# Altium PCB ARDUINO MEGA2560 EXPANSION BOARD.PcbDoc
Units mm, origin at the board's own origin, x right, y up, seen from the top; angles counter-clockwise.
Board outline 132.72 x 90.17 mm, 2 copper layers (Top Layer, Bottom Layer); 30 components, 58 nets, 698 pads, 0 vias.
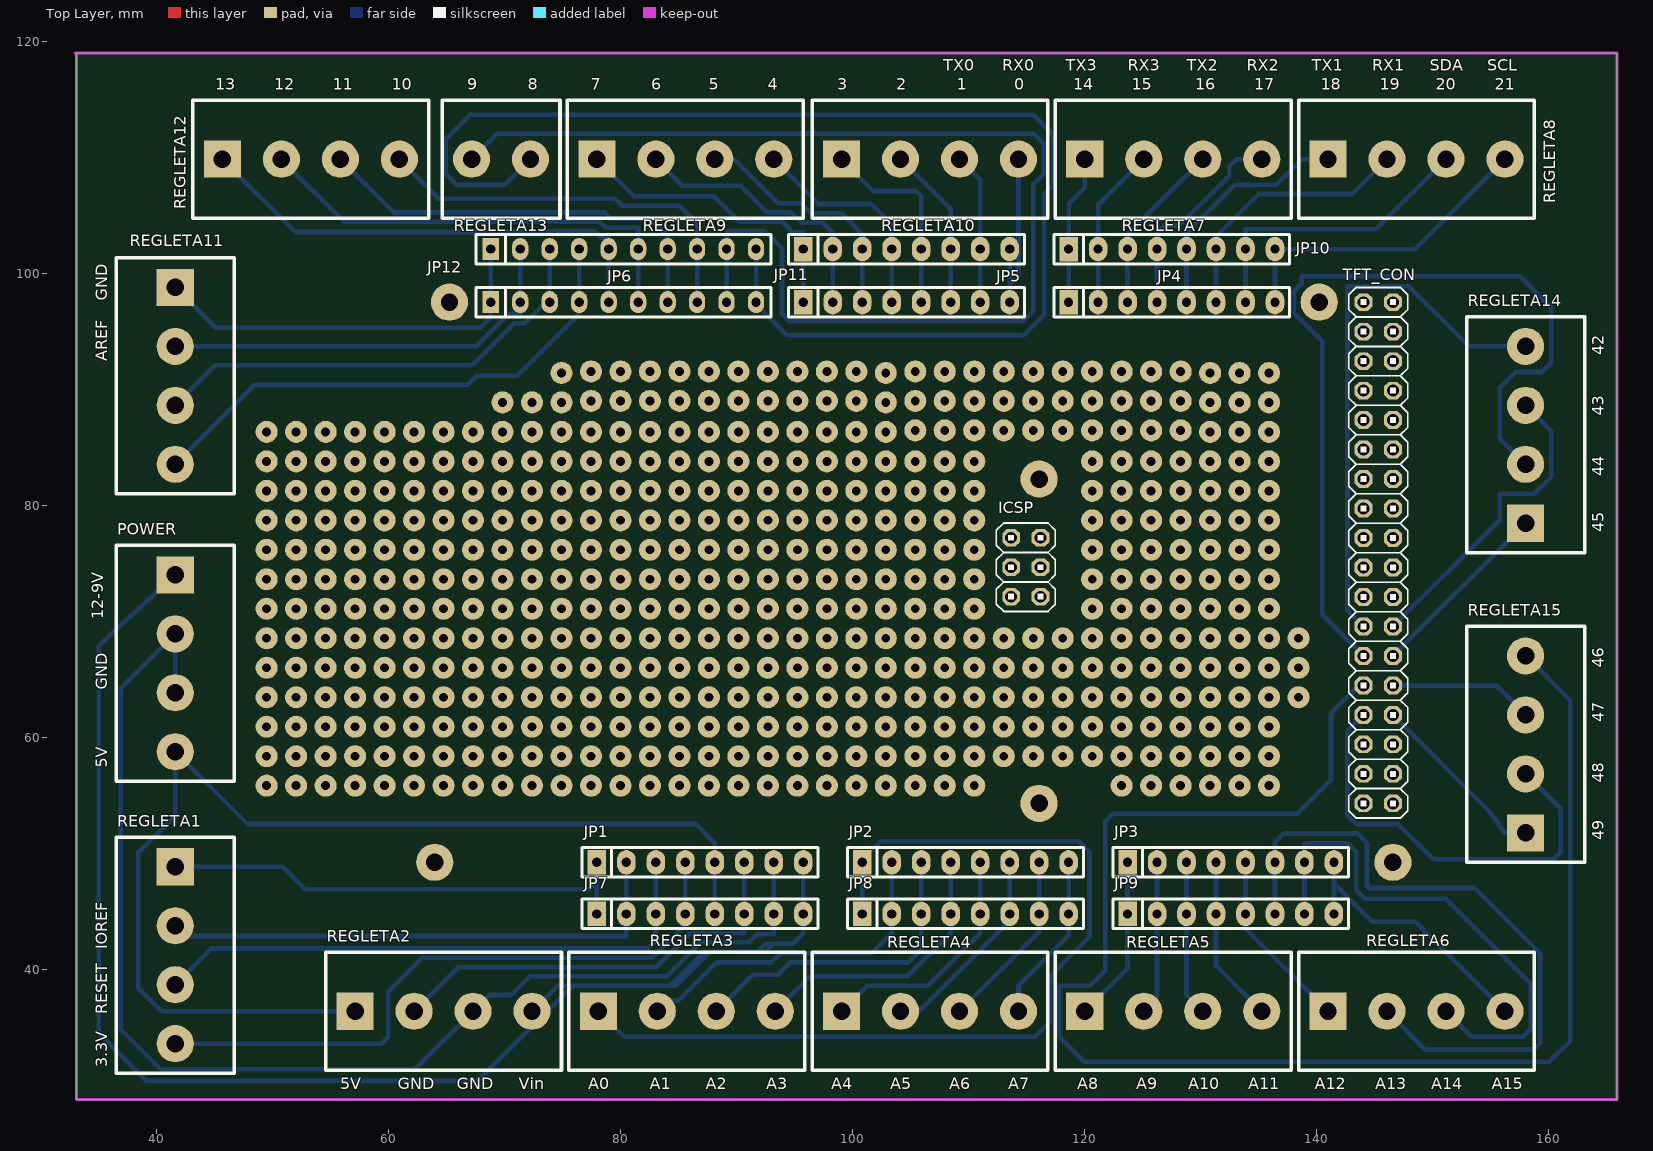
[diagram p0: Top Layer view]
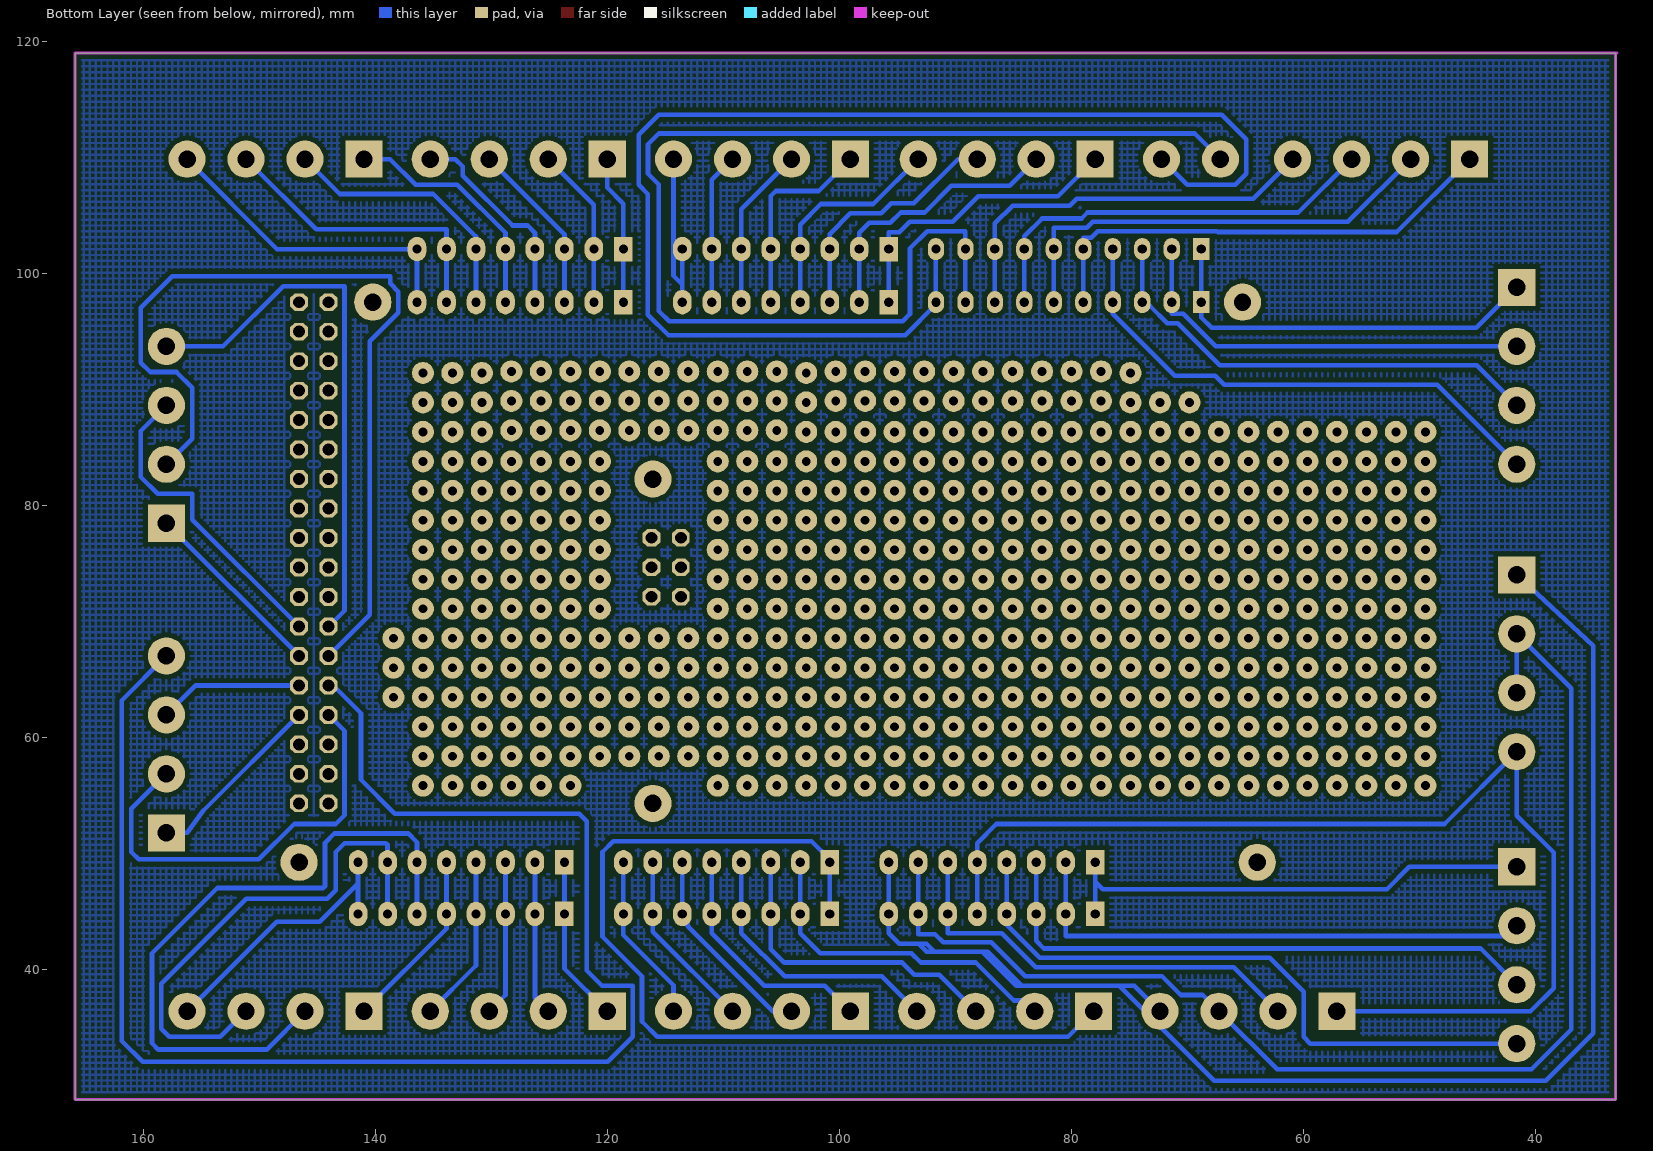
[diagram p1: Bottom Layer view, seen from below]

## Layer stack, top to bottom
Top Solder: solder mask 0.0102, Solder Resist, Dk 3.5
Top Layer: signal copper 0.0356
Dielectric 1: dielectric 0.32, FR-4, Dk 4.8
Bottom Layer: signal copper 0.0356
Bottom Solder: solder mask 0.0102, Solder Resist, Dk 3.5

## Board outline
33.147,118.999 33.147,28.829 162.306,28.829 165.862,28.829 165.862,118.999

## Design rules (kind name [scope] priority, off if disabled: settings)
Clearance [All] p1: gap=0.4
PolygonConnect [All] p1: connectstyle=Relief reliefconductorwidth=0.254 reliefentries=4 polygonreliefangle="90 Angle" airgapwidth=0.254
RoutingLayers [All] p1: top layer_v5=FALSE bottom layer_v5=TRUE
RoutingTopology [All] p1: topology=Daisy_Balanced
RoutingVias [All] p1: holewidth=0.711 width=1.5 viastyle="Through Hole" minholewidth=0.711 minwidth=1.5 maxholewidth=0.711 maxwidth=1.5
SolderMaskExpansion [All] p1: expansion=0.102
Width [All] p1: maxlimit=0.8 minlimit=0.4 preferedwidth=0.4
28 further rules are at their usual default settings.

## Components (designator, comment, footprint, x,y, rotation, side; value= is the part's Value field where it differs from the comment)
ICSP "" SIP_2X03 113.665,77.216 r270 top
JP1 "" SIP_8 77.978,49.276 r0 top
JP2 "" SIP_8 100.838,49.276 r0 top
JP3 "" SIP_8 123.698,49.276 r0 top
JP4 "" SIP_8 118.618,97.536 r0 top
JP5 "" SIP_8 95.758,97.536 r0 top
JP6 "" SIP_10 68.834,97.536 r0 top
JP7 "" SIP_8 77.978,44.831 r0 top
JP8 "" SIP_8 100.838,44.831 r0 top
JP9 "" SIP_8 123.698,44.831 r0 top
JP10 "" SIP_8 118.618,102.108 r0 top
JP11 "" SIP_8 95.758,102.108 r0 top
JP12 "" SIP_10 68.834,102.108 r0 top
POWER "" REGLETA_4 41.656,74.041 r270 top
REGLETA1 "" REGLETA_4 41.656,48.895 r270 top
REGLETA2 "" REGLETA_4 57.15,36.449 r0 top
REGLETA3 "" REGLETA_4 78.105,36.449 r0 top
REGLETA4 "" REGLETA_4 99.06,36.449 r0 top
REGLETA5 "" REGLETA_4 120.015,36.449 r0 top
REGLETA6 "" REGLETA_4 140.97,36.449 r0 top
REGLETA7 "" REGLETA_4 120.015,109.855 r0 top
REGLETA8 "" REGLETA_4 140.97,109.855 r0 top
REGLETA9 "" REGLETA_4 77.978,109.855 r0 top
REGLETA10 "" REGLETA_4 99.06,109.855 r0 top
REGLETA11 "" REGLETA_4 41.656,98.806 r270 top
REGLETA12 "" REGLETA_4 45.72,109.855 r0 top
REGLETA13 "" REGLETA_2 67.183,109.855 r0 top
REGLETA14 "" REGLETA_4 157.988,78.486 r90 top
REGLETA15 "" REGLETA_4 157.988,51.816 r90 top
TFT_CON "" SIP_2X18 144.018,97.536 r270 top

## Footprints (in the part's own frame and the unit in brackets; to place one, negate y for a bottom-side part, rotate by r counter-clockwise, add the part's x,y. Pads: shape width x height; smd on the part's side, far side on the other; paste and mask are expansions set on the pad)
REGLETA_2 [mm]
  round 3.2 hole 1.5: 1(0,0) 2(5.08,0)
  silkscreen extent -2.54,-5.08 7.62,5.08
REGLETA_4 [mm]
  rect 3.2x3.2 hole 1.5: 1(0,0)
  round 3.2 hole 1.5: 2(5.08,0) 3(10.16,0) 4(15.24,0)
  silkscreen extent -2.54,-5.08 17.78,5.08
SIP_2X03 [mil]
  oct 60x60 hole 40: 1(-0.98,0) 2(-0.98,100) 3(99.02,0) 4(99.02,100) 5(199.02,0) 6(199.02,100)
  silkscreen extent -51,-50 249,150
SIP_2X18 [mil]
  oct 60x60 hole 40: 1(0,0) 2(0,100) 3(100,0) 4(100,100) 5(200,0) 6(200,100) 7(300,0) 8(300,100) 9(400,0) 10(400,100) 11(500,0) 12(500,100) 13(600,0) 14(600,100) 15(700,0) 16(700,100) 17(800,0) 18(800,100) 19(900,0) 20(900,100) 21(1000,0) 22(1000,100) 23(1100,0) 24(1100,100) 25(1200,0) 26(1200,100) 27(1300,0) 28(1300,100) 29(1400,0) 30(1400,100) 31(1500,0) 32(1500,100) 33(1600,0) 34(1600,100) 35(1700,0) 36(1700,100)
  silkscreen extent -50,-50 1750,150
SIP_8 [mm]
  rect 1.6x2.1 hole 0.8: 1(0,0)
  oval 1.6x2.1 hole 0.8: 2(2.54,0) 3(5.08,0) 4(7.62,0) 5(10.16,0) 6(12.7,0) 7(15.24,0) 8(17.78,0)
  silkscreen extent -1.27,-1.27 19.05,1.27
SIP_10 [mm]
  rect 1.4x1.9 hole 0.8: 1(0,0)
  oval 1.4x1.9 hole 0.8: 2(2.54,0) 3(5.08,0) 4(7.62,0) 5(10.16,0) 6(12.7,0) 7(15.24,0) 8(17.78,0) 9(20.32,0) 10(22.86,0)
  silkscreen extent -1.27,-1.27 24.13,1.27

## Part data
ICSP: library part SIP_2X3
JP1 JP2 JP3 JP4 JP5 JP7 JP8 JP9 JP10 JP11: library part SIP_8
JP6 JP12: library part SIP_10
POWER REGLETA1 REGLETA2 REGLETA3 REGLETA4 REGLETA5 REGLETA6 REGLETA7 REGLETA8 REGLETA9 REGLETA10 REGLETA11 REGLETA12 REGLETA14 REGLETA15: library part REGLETA_4
REGLETA13: library part REGLETA_2
TFT_CON: library part SIP_2X18

## Free pads (board coordinates)
  round 1.9 hole 0.762: 1(49.53,58.42) 1(49.53,86.36) 1(52.07,58.42) 1(52.07,63.5) 1(52.07,68.58) 1(52.07,73.66) 1(52.07,78.74) 1(52.07,83.82) 1(52.07,86.36) 1(77.47,58.42) 1(77.47,86.36) 1(77.47,89.027) 1(77.47,91.567) 1(80.01,58.42) 1(80.01,63.5) 1(80.01,68.58) 1(80.01,73.66) 1(80.01,78.74) 1(80.01,83.82) 1(80.01,86.36) 1(105.41,55.88) 1(105.41,58.42) 1(105.41,63.5) 1(105.41,68.58) 1(105.41,89.027) 1(105.41,91.567) 1(123.19,55.88) 1(130.81,55.88) 1(133.35,91.44) 1(135.89,91.44) 2(49.53,83.82) 2(54.61,58.42) 2(54.61,63.5) 2(54.61,68.58) 2(54.61,73.66) 2(54.61,78.74) 2(54.61,83.82) 2(54.61,86.36) 2(77.47,83.82) 2(80.01,89.027) 2(80.01,91.567) 2(82.55,58.42) 2(82.55,63.5) 2(82.55,68.58) 2(82.55,73.66) 2(82.55,78.74) 2(82.55,83.82) 2(82.55,86.36) 2(107.95,55.88) 2(107.95,58.42) 2(107.95,63.5) 2(107.95,68.58) 2(107.95,89.027) 2(107.95,91.567) 2(125.73,55.88) 2(133.35,55.88) 2(133.35,88.9) 2(135.89,88.9) 3(49.53,81.28) 3(57.15,58.42) 3(57.15,63.5) 3(57.15,68.58) 3(57.15,73.66) 3(57.15,78.74) 3(57.15,83.82) 3(57.15,86.36) 3(77.47,81.28) 3(82.55,89.027) 3(82.55,91.567) 3(85.09,58.42) 3(85.09,63.5) 3(85.09,68.58) 3(85.09,73.66) 3(85.09,78.74) 3(85.09,83.82) 3(85.09,86.36) 3(110.49,55.88) 3(110.49,58.42) 3(110.49,63.5) 3(110.49,68.58) 3(110.49,89.027) 3(110.49,91.567) 3(128.27,55.88) 3(133.35,86.36) 3(135.89,55.88) 3(135.89,86.36) 4(49.53,78.74) 4(59.69,58.42) 4(59.69,63.5) 4(59.69,68.58) 4(59.69,73.66) 4(59.69,78.74) 4(59.69,83.82) 4(59.69,86.36) 4(77.47,78.74) 4(85.09,89.027) 4(85.09,91.567) 4(87.63,58.42) 4(87.63,63.5) 4(87.63,68.58) 4(87.63,73.66) 4(87.63,78.74) 4(87.63,83.82) 4(87.63,86.36) 4(107.95,83.82) 4(110.49,83.82) 4(113.03,58.42) 4(113.03,63.5) 4(113.03,68.58) 4(113.03,89.027) 4(113.03,91.567) 4(125.73,83.82) 4(128.27,83.82) 4(133.35,83.82) 4(135.89,83.82) 5(49.53,76.2) 5(62.23,58.42) 5(62.23,63.5) 5(62.23,68.58) 5(62.23,73.66) 5(62.23,78.74) 5(62.23,83.82) 5(62.23,86.36) 5(77.47,76.2) 5(87.63,89.027) 5(87.63,91.567) 5(90.17,58.42) 5(90.17,63.5) 5(90.17,68.58) 5(90.17,73.66) 5(90.17,78.74) 5(90.17,83.82) 5(90.17,86.36) 5(107.95,81.28) 5(110.49,81.28) 5(115.57,58.42) 5(115.57,63.5) 5(115.57,68.58) 5(115.57,89.027) 5(115.57,91.567) 5(125.73,81.28) 5(128.27,81.28) 5(133.35,81.28) 5(135.89,81.28) 6(49.53,73.66) 6(64.77,58.42) 6(64.77,63.5) 6(64.77,68.58) 6(64.77,73.66) 6(64.77,78.74) 6(64.77,83.82) 6(64.77,86.36) 6(77.47,73.66) 6(90.17,89.027) 6(90.17,91.567) 6(92.71,58.42) 6(92.71,63.5) 6(92.71,68.58) 6(92.71,73.66) 6(92.71,78.74) 6(92.71,83.82) 6(92.71,86.36) 6(107.95,78.74) 6(110.49,78.74) 6(118.11,58.42) 6(118.11,63.5) 6(118.11,68.58) 6(118.11,89.027) 6(118.11,91.567) 6(125.73,78.74) 6(128.27,78.74) 6(133.35,78.74) 6(135.89,78.74) 7(49.53,71.12) 7(67.31,58.42) 7(67.31,63.5) 7(67.31,68.58) 7(67.31,73.66) 7(67.31,78.74) 7(67.31,83.82) 7(67.31,86.36) 7(77.47,71.12) 7(92.71,89.027) 7(92.71,91.567) 7(95.25,58.42) 7(95.25,63.5) 7(95.25,68.58) 7(95.25,73.66) 7(95.25,78.74) 7(95.25,83.82) 7(95.25,86.36) 7(107.95,76.2) 7(110.49,76.2) 7(120.65,58.42) 7(120.65,63.5) 7(120.65,68.58) 7(120.65,89.027) 7(120.65,91.567) 7(125.73,76.2) 7(128.27,76.2) 7(133.35,76.2) 7(135.89,76.2) 8(49.53,68.58) 8(69.85,58.42) 8(69.85,63.5) 8(69.85,68.58) 8(69.85,73.66) 8(69.85,78.74) 8(69.85,83.82) 8(69.85,86.36) 8(77.47,68.58) 8(95.25,89.027) 8(95.25,91.567) 8(97.79,58.42) 8(97.79,63.5) 8(97.79,68.58) 8(97.79,73.66) 8(97.79,78.74) 8(97.79,83.82) 8(97.79,86.36) 8(107.95,73.66) 8(110.49,73.66) 8(123.19,58.42) 8(123.19,63.5) 8(123.19,68.58) 8(123.19,89.027) 8(123.19,91.567) 8(125.73,73.66) 8(128.27,73.66) 8(130.81,58.42) 8(130.81,63.5) 8(133.35,73.66) 8(135.89,73.66) 9(49.53,66.04) 9(72.39,58.42) 9(72.39,63.5) 9(72.39,68.58) 9(72.39,73.66) 9(72.39,78.74) 9(72.39,83.82) 9(72.39,86.36) 9(72.39,88.9) 9(77.47,66.04) 9(97.79,89.027) 9(97.79,91.567) 9(100.33,58.42) 9(100.33,63.5) 9(100.33,68.58) 9(100.33,73.66) 9(100.33,78.74) 9(100.33,83.82) 9(100.33,86.36) 9(107.95,71.12) 9(110.49,71.12) 9(125.73,58.42) 9(125.73,63.5) 9(125.73,68.58) 9(125.73,71.12) 9(125.73,89.027) 9(125.73,91.567) 9(128.27,71.12) 9(133.35,58.42) 9(133.35,63.5) 9(133.35,71.12) 9(135.89,71.12) 10(49.53,63.5) 10(69.85,88.9) 10(74.93,58.42) 10(74.93,63.5) 10(74.93,68.58) 10(74.93,73.66) 10(74.93,78.74) 10(74.93,83.82) 10(74.93,86.36) 10(74.93,88.9) 10(74.93,91.44) 10(77.47,63.5) 10(100.33,89.027) 10(100.33,91.567) 10(102.87,58.42) 10(102.87,63.5) 10(102.87,68.58) 10(102.87,73.66) 10(102.87,78.74) 10(102.87,83.82) 10(102.87,86.36) 10(128.27,58.42) 10(128.27,63.5) 10(128.27,68.58) 10(128.27,89.027) 10(128.27,91.567) 10(133.35,68.58) 10(135.89,58.42) 10(135.89,63.5) 10(135.89,68.58) 10(138.43,63.5) 10(138.43,66.04) 10(138.43,68.58) 11(74.93,55.88) 11(74.93,60.96) 11(74.93,66.04) 11(74.93,71.12) 11(74.93,76.2) 11(74.93,81.28) 11(102.87,55.88) 11(102.87,60.96) 11(102.87,66.04) 11(102.87,71.12) 11(102.87,76.2) 11(102.87,81.28) 11(128.27,60.96) 11(128.27,66.04) 11(128.27,86.487) 11(130.81,68.58) 11(135.89,60.96) 11(135.89,66.04) 12(72.39,55.88) 12(72.39,60.96) 12(72.39,66.04) 12(72.39,71.12) 12(72.39,76.2) 12(72.39,81.28) 12(100.33,55.88) 12(100.33,60.96) 12(100.33,66.04) 12(100.33,71.12) 12(100.33,76.2) 12(100.33,81.28) 12(105.41,71.12) 12(120.65,71.12) 12(123.19,71.12) 12(125.73,60.96) 12(125.73,66.04) 12(125.73,86.487) 12(130.81,71.12) 12(133.35,60.96) 12(133.35,66.04) 13(69.85,55.88) 13(69.85,60.96) 13(69.85,66.04) 13(69.85,71.12) 13(69.85,76.2) 13(69.85,81.28) 13(97.79,55.88) 13(97.79,60.96) 13(97.79,66.04) 13(97.79,71.12) 13(97.79,76.2) 13(97.79,81.28) 13(105.41,73.66) 13(120.65,73.66) 13(123.19,60.96) 13(123.19,66.04) 13(123.19,73.66) 13(123.19,86.487) 13(130.81,60.96) 13(130.81,66.04) 13(130.81,73.66) 14(67.31,55.88) 14(67.31,60.96) 14(67.31,66.04) 14(67.31,71.12) 14(67.31,76.2) 14(67.31,81.28) 14(95.25,55.88) 14(95.25,60.96) 14(95.25,66.04) 14(95.25,71.12) 14(95.25,76.2) 14(95.25,81.28) 14(105.41,76.2) 14(120.65,60.96) 14(120.65,66.04) 14(120.65,76.2) 14(120.65,86.487) 14(123.19,76.2) 14(130.81,76.2) 15(64.77,55.88) 15(64.77,60.96) 15(64.77,66.04) 15(64.77,71.12) 15(64.77,76.2) 15(64.77,81.28) 15(92.71,55.88) 15(92.71,60.96) 15(92.71,66.04) 15(92.71,71.12) 15(92.71,76.2) 15(92.71,81.28) 15(105.41,78.74) 15(118.11,60.96) 15(118.11,66.04) 15(118.11,86.487) 15(120.65,78.74) 15(123.19,78.74) 15(130.81,78.74) 16(62.23,55.88) 16(62.23,60.96) 16(62.23,66.04) 16(62.23,71.12) 16(62.23,76.2) 16(62.23,81.28) 16(90.17,55.88) 16(90.17,60.96) 16(90.17,66.04) 16(90.17,71.12) 16(90.17,76.2) 16(90.17,81.28) 16(105.41,81.28) 16(115.57,60.96) 16(115.57,66.04) 16(115.57,86.487) 16(120.65,81.28) 16(123.19,81.28) 16(130.81,81.28) 17(59.69,55.88) 17(59.69,60.96) 17(59.69,66.04) 17(59.69,71.12) 17(59.69,76.2) 17(59.69,81.28) 17(87.63,55.88) 17(87.63,60.96) 17(87.63,66.04) 17(87.63,71.12) 17(87.63,76.2) 17(87.63,81.28) 17(105.41,83.82) 17(113.03,60.96) 17(113.03,66.04) 17(113.03,86.487) 17(120.65,83.82) 17(123.19,83.82) 17(130.81,83.82) 18(57.15,55.88) 18(57.15,60.96) 18(57.15,66.04) 18(57.15,71.12) 18(57.15,76.2) 18(57.15,81.28) 18(85.09,55.88) 18(85.09,60.96) 18(85.09,66.04) 18(85.09,71.12) 18(85.09,76.2) 18(85.09,81.28) 18(110.49,60.96) 18(110.49,66.04) 18(110.49,86.487) 18(130.81,86.36) 19(54.61,55.88) 19(54.61,60.96) 19(54.61,66.04) 19(54.61,71.12) 19(54.61,76.2) 19(54.61,81.28) 19(82.55,55.88) 19(82.55,60.96) 19(82.55,66.04) 19(82.55,71.12) 19(82.55,76.2) 19(82.55,81.28) 19(102.87,88.9) 19(107.95,60.96) 19(107.95,66.04) 19(107.95,86.487) 19(130.81,88.9) 20(49.53,55.88) 20(49.53,60.96) 20(52.07,55.88) 20(52.07,60.96) 20(52.07,66.04) 20(52.07,71.12) 20(52.07,76.2) 20(52.07,81.28) 20(77.47,55.88) 20(77.47,60.96) 20(80.01,55.88) 20(80.01,60.96) 20(80.01,66.04) 20(80.01,71.12) 20(80.01,76.2) 20(80.01,81.28) 20(102.87,91.44) 20(105.41,60.96) 20(105.41,66.04) 20(105.41,86.487) 20(130.81,91.44)
  round 3.2 hole 1.5: 1(64.008,49.276) 1(65.278,97.536) 1(116.078,54.356) 1(116.078,82.296) 1(140.208,97.536) 1(146.558,49.276)

## Nets (pads, with @x,y where several pads share a name; then routed paths per layer and width w, separated by ;. In a path a pad name is that pad's centre, name@x,y a point inside that pad or via, vN(x,y) a via of type N, cw(c..) or ccw(c..) an arc to the next point about the centre after c; other vN are vias at no path point)
NetJP1_1: JP1.1 JP7.1 REGLETA1.1 | length 41.8
  Bottom Layer w0.4: REGLETA1.1 50.902,48.895 52.832,46.965 77.318,46.965 77.978,47.625 ; JP7.1 77.978,47.625 ; JP1.1 77.978,47.625
NetJP1_2: JP1.2 JP7.2 REGLETA1.2 | length 45.6
  Bottom Layer w0.4: REGLETA1.2 42.545,42.926 80.518,42.926 JP7.2 JP1.2
NetJP1_3: JP1.3 JP7.3 REGLETA1.3 | length 49.7
  Bottom Layer w0.4: REGLETA1.3 44.77,41.849 82.387,41.849 83.058,42.52 JP7.3 JP1.3
NetJP1_4: JP1.4 JP7.4 REGLETA1.4 | length 55.8
  Bottom Layer w0.4: REGLETA1.4 59.436,33.655 60.02,34.239 60.02,38.125 62.944,41.049 82.731,41.049 85.598,43.916 JP7.4 JP1.4
NetJP1_5: JP1.5 JP7.5 POWER.4 REGLETA2.1 | length 97
  Bottom Layer w0.4: REGLETA2.1 40.472,36.449 38.481,38.44 38.481,50.12 41.656,53.295 POWER.4 47.879,52.578 86.487,52.578 88.138,50.927 JP1.5 JP7.5
NetJP1_6: JP1.6 JP7.6 REGLETA2.2 | length 37.3
  Bottom Layer w0.4: REGLETA2.2 66.03,40.249 83.099,40.249 86.031,43.181 90.678,43.181 JP7.6 JP1.6
NetJP1_7: JP1.7 JP7.7 POWER.2 POWER.3 REGLETA2.3 | length 109.8
  Bottom Layer w0.4: POWER.3 POWER.2 36.957,64.262 36.957,34.874 40.386,31.445 62.306,31.445 REGLETA2.3 68.707,37.846 70.612,37.846 72.215,39.449 83.98,39.449 86.912,42.381 91.073,42.381 91.771,43.078 93.218,43.078 JP7.7 JP1.7
NetJP1_8: JP1.8 JP7.8 POWER.1 REGLETA2.4 | length 126.8
  Bottom Layer w0.4: POWER.1 35.052,67.945 35.052,34.544 39.141,30.455 67.701,30.455 75.895,38.649 ; REGLETA2.4 74.59,38.649 75.895,38.649 ; JP1.8 JP7.8 95.758,43.18 94.844,42.266 93.186,42.266 ; 75.895,38.649 84.312,38.649 ; 84.312,38.649 84.785,38.649 87.717,41.581 ; 84.312,38.649 87.244,41.581 87.717,41.581 ; 87.717,41.581 91.822,41.581 ; 91.822,41.581 92.501,41.581 93.186,42.266 ; 91.822,41.581 92.507,42.266 93.186,42.266
NetJP2_1: JP2.1 JP8.1 REGLETA3.1 | length 81.7
  Bottom Layer w0.4: REGLETA3.1 80.315,34.239 115.694,34.239 117.015,35.56 117.015,39.449 120.421,42.855 120.421,50.165 119.482,51.105 102.413,51.105 100.838,49.53 JP2.1 JP8.1
NetJP2_2: JP2.2 JP8.2 REGLETA3.2 | length 29.1
  Bottom Layer w0.4: REGLETA3.2 84.106,37.37 84.999,37.37 88.272,40.643 92.992,40.643 93.801,41.453 101.651,41.453 103.378,43.18 JP8.2 JP2.2
NetJP2_3: JP2.3 JP8.3 REGLETA3.3 | length 27.4
  Bottom Layer w0.4: REGLETA3.3 91.403,39.587 93.548,39.587 94.601,40.64 104.775,40.64 105.918,41.783 JP8.3 JP2.3
NetJP2_4: JP2.4 JP8.4 REGLETA3.4 | length 24
  Bottom Layer w0.4: REGLETA3.4 96.345,39.449 104.727,39.449 108.458,43.18 JP8.4 JP2.4
NetJP2_5: JP2.5 JP8.5 REGLETA4.1 | length 20.8
  Bottom Layer w0.4: REGLETA4.1 101.26,38.649 106.467,38.649 110.998,43.18 JP8.5 JP2.5
NetJP2_6: JP2.6 JP8.6 REGLETA4.2 | length 17.6
  Bottom Layer w0.4: REGLETA4.2 105.75,36.449 113.03,43.729 JP8.6 JP2.6
NetJP2_7: JP2.7 JP8.7 REGLETA4.3 | length 15.7
  Bottom Layer w0.4: REGLETA4.3 116.078,43.307 JP8.7 JP2.7
NetJP2_8: JP2.8 JP8.8 REGLETA4.4 | length 14.6
  Bottom Layer w0.4: REGLETA4.4 114.3,38.7 118.618,43.018 JP8.8 JP2.8
NetJP3_1: JP3.1 JP9.1 REGLETA5.1 | length 14.4
  Bottom Layer w0.4: REGLETA5.1 123.698,40.132 JP9.1 JP3.1
NetJP3_2: JP3.2 JP9.2 REGLETA5.2 | length 13.3
  Bottom Layer w0.4: REGLETA5.2 126.238,37.592 JP9.2 JP3.2
NetJP3_3: JP3.3 JP9.3 REGLETA5.3 | length 13.4
  Bottom Layer w0.4: JP3.3 JP9.3 128.778,37.846 REGLETA5.3
NetJP3_4: JP3.4 JP9.4 REGLETA5.4 | length 14.5
  Bottom Layer w0.4: JP3.4 JP9.4 131.318,40.386 REGLETA5.4
NetJP3_5: JP3.5 JP9.5 REGLETA6.1 | length 15.8
  Bottom Layer w0.4: JP3.5 JP9.5 133.858,43.561 REGLETA6.1
NetJP3_6: JP3.6 JP9.6 REGLETA6.2 | length 58.3
  Bottom Layer w0.4: JP9.6 JP3.6 136.398,51.003 137.16,51.765 143.51,51.765 144.323,50.952 144.323,47.219 144.475,47.066 153.619,47.066 159.233,41.453 159.233,33.68 158.7,33.147 149.352,33.147 REGLETA6.2
NetJP3_7: JP3.7 JP9.7 REGLETA6.3 | length 44.8
  Bottom Layer w0.4: JP9.7 JP3.7 138.938,50.775 139.09,50.927 142.646,50.927 143.408,50.165 143.408,46.863 144.145,46.126 151.105,46.126 158.42,38.811 158.42,34.925 157.734,34.239 153.34,34.239 REGLETA6.3
NetJP3_8: JP3.8 JP9.8 REGLETA6.4 | length 23.7
  Bottom Layer w0.4: JP9.8 141.478,47.473 ; JP3.8 141.478,47.473 ; REGLETA6.4 148.488,44.171 144.78,44.171 141.478,47.473
NetJP4_1: JP4.1 JP10.1 REGLETA7.1 | length 12.9
  Bottom Layer w0.4: JP4.1 JP10.1 118.618,106.02 120.015,107.417 REGLETA7.1
NetJP4_2: JP4.2 JP10.2 REGLETA7.2 | length 13.9
  Bottom Layer w0.4: JP4.2 JP10.2 121.158,105.918 REGLETA7.2
NetJP4_3: JP4.3 JP10.3 REGLETA7.3 | length 15
  Bottom Layer w0.4: JP4.3 JP10.3 123.698,103.378 REGLETA7.3
NetJP4_4: JP4.4 JP10.4 REGLETA7.4 | length 18.1
  Bottom Layer w0.4: JP4.4 JP10.4 126.238,103.505 126.873,104.14 128.168,104.14 132.461,108.433 132.461,109.22 133.096,109.855 REGLETA7.4
NetJP4_5: JP4.5 JP10.5 REGLETA8.1 | length 20.8
  Bottom Layer w0.4: JP4.5 JP10.5 128.778,103.505 132.928,107.655 136.525,107.655 138.725,109.855 REGLETA8.1
NetJP4_6: JP4.6 JP10.6 REGLETA8.2 | length 23.1
  Bottom Layer w0.4: JP4.6 JP10.6 131.318,103.187 134.986,106.855 143.05,106.855 REGLETA8.2
NetJP4_7: JP4.7 JP10.7 REGLETA8.3 | length 26
  Bottom Layer w0.4: JP4.7 JP10.7 133.858,103.81 145.085,103.81 REGLETA8.3
NetJP4_8: JP4.8 JP10.8 REGLETA8.4 | length 27.6
  Bottom Layer w0.4: JP4.8 JP10.8 148.463,102.108 REGLETA8.4
NetJP5_1: JP5.1 JP11.1 REGLETA9.1 | length 26.4
  Bottom Layer w0.4: REGLETA9.1 81.178,106.655 88.062,106.655 90.258,104.458 93.935,104.458 94.837,103.556 95.758,103.556 JP11.1 JP5.1
NetJP5_2: JP5.2 JP11.2 REGLETA9.2 | length 23.8
  Bottom Layer w0.4: REGLETA9.2 85.344,107.569 90.357,107.569 92.668,105.258 94.735,105.258 95.624,104.369 97.434,104.369 98.298,103.505 JP11.2 JP5.2
NetJP5_3: JP5.3 JP11.3 REGLETA9.3 | length 21.2
  Bottom Layer w0.4: REGLETA9.3 89.789,109.855 93.586,106.058 95.535,106.058 96.411,105.181 99.06,105.181 100.838,103.403 JP11.3 JP5.3
NetJP5_4: JP5.4 JP11.4 REGLETA9.4 | length 19.2
  Bottom Layer w0.4: REGLETA9.4 97.079,105.994 101.6,105.994 103.378,104.216 JP11.4 JP5.4
NetJP5_5: JP5.5 JP11.5 REGLETA10.1 | length 17.3
  Bottom Layer w0.4: REGLETA10.1 101.803,107.112 105.486,107.112 105.918,106.68 JP11.5 JP5.5
NetJP5_6: JP5.6 JP11.6 REGLETA10.2 | length 14.1
  Bottom Layer w0.4: REGLETA10.2 108.458,105.537 JP11.6 JP5.6
NetJP5_7: JP5.7 JP11.7 REGLETA10.3 | length 13.1
  Bottom Layer w0.4: REGLETA10.3 110.998,108.077 JP11.7 JP5.7
NetJP5_8: JP5.8 JP11.8 REGLETA10.4 | length 15.7
  Bottom Layer w0.4: JP5.8 113.538,99.06 ; JP11.8 113.538,99.06 ; REGLETA10.4 114.3,99.822 113.538,99.06
NetJP6_1: JP6.1 JP12.1 REGLETA11.1 | length 34.9
  Bottom Layer w0.4: REGLETA11.1 45.136,95.326 67.945,95.326 68.834,96.215 JP6.1 JP12.1
NetJP6_2: JP6.2 JP12.2 REGLETA11.2 | length 36.5
  Bottom Layer w0.4: REGLETA11.2 67.571,93.726 70.377,96.533 71.374,96.533 JP6.2 JP12.2
NetJP6_3: JP6.3 JP12.3 REGLETA11.3 | length 40.7
  Bottom Layer w0.4: REGLETA11.3 45.11,92.1 67.234,92.1 70.866,95.733 71.78,95.733 73.254,97.206 73.914,97.206 JP6.3 JP12.3
NetJP6_4: JP6.4 JP12.4 REGLETA11.4 | length 45.8
  Bottom Layer w0.4: REGLETA11.4 48.514,90.424 66.853,90.424 67.615,91.186 71.12,91.186 76.454,96.52 JP6.4 JP12.4
NetJP6_5: JP6.5 JP12.5 REGLETA12.1 | length 41.7
  Bottom Layer w0.4: REGLETA12.1 51.993,103.582 67.412,103.582 67.488,103.658 77.749,103.658 78.309,103.099 78.994,103.099 JP12.5 JP6.5
NetJP6_6: JP6.6 JP12.6 REGLETA12.2 | length 39.6
  Bottom Layer w0.4: REGLETA12.2 56.197,104.458 78.182,104.458 78.703,103.937 81.534,103.937 JP12.6 JP6.6
NetJP6_7: JP6.7 JP12.7 REGLETA12.3 | length 36.6
  Bottom Layer w0.4: REGLETA12.3 60.477,105.258 78.638,105.258 79.15,104.745 82.55,104.745 84.074,103.221 JP12.7 JP6.7
NetJP6_8: JP6.8 JP12.8 REGLETA12.4 | length 34.7
  Bottom Layer w0.4: REGLETA12.4 64.364,106.451 79.553,106.451 80.162,105.842 85.09,105.842 86.614,104.318 JP12.8 JP6.8
NetJP6_9: JP6.9 JP12.9 REGLETA13.1 | length 104.8
  Bottom Layer w0.4: REGLETA13.1 69.393,112.065 115.56,112.065 116.5,111.125 116.5,108.601 115.57,107.671 115.57,96.774 114.681,95.885 94.564,95.885 93.929,96.52 93.929,102.184 92.455,103.658 89.154,103.658 JP12.9 JP6.9
NetJP6_10: JP6.10 JP12.10 REGLETA13.2 | length 112.7
  Bottom Layer w0.4: REGLETA13.2 70.053,107.645 65.913,107.645 64.973,108.585 64.973,111.582 67.081,113.69 115.57,113.69 117.3,111.96 117.3,107.645 116.51,106.855 116.51,96.469 114.732,94.691 94.336,94.691 91.694,97.333 JP6.10 JP12.10
NetREGLETA14_1: REGLETA14.1 TFT_CON.26 | length 16.2
  Bottom Layer w0.4: TFT_CON.26 REGLETA14.1
NetREGLETA14_2: REGLETA14.2 TFT_CON.25 | length 75.7
  Bottom Layer w0.4: TFT_CON.25 140.462,70.612 140.462,94.17 138.008,96.625 138.008,98.447 138.709,99.149 138.709,99.771 157.48,99.771 160.198,97.053 160.198,92.329 159.385,91.516 157.124,91.516 155.778,90.17 155.778,85.776 REGLETA14.2
NetREGLETA14_3: REGLETA14.3 TFT_CON.24 | length 27.4
  Bottom Layer w0.4: TFT_CON.24 155.753,78.791 155.753,81.026 158.75,81.026 160.198,82.474 160.198,86.436 REGLETA14.3
NetREGLETA14_4: REGLETA14.4 TFT_CON.23 | length 47.4
  Bottom Layer w0.4: TFT_CON.23 142.646,70.968 142.646,98.908 147.93,98.908 153.111,93.726 REGLETA14.4
NetREGLETA15_1: REGLETA15.1 TFT_CON.30 | length 15.8
  Bottom Layer w0.4: TFT_CON.30 154.838,53.696 156.21,51.816 REGLETA15.1
NetREGLETA15_2: REGLETA15.2 TFT_CON.29 | length 37.4
  Bottom Layer w0.4: TFT_CON.29 142.646,60.604 142.646,53.34 143.408,52.578 146.99,52.578 150.038,49.53 160.376,49.53 161.011,50.165 161.011,53.873 REGLETA15.2
NetREGLETA15_3: REGLETA15.3 TFT_CON.28 | length 12.5
  Bottom Layer w0.4: TFT_CON.28 155.448,64.516 REGLETA15.3
NetREGLETA15_4: REGLETA15.4 TFT_CON.27 | length 132.6
  Bottom Layer w0.4: TFT_CON.27 143.637,64.516 141.224,62.103 141.224,56.388 138.303,53.467 122.428,53.467 121.768,52.807 121.768,39.954 120.462,38.649 117.815,38.649 117.815,34.239 119.974,32.08 160.02,32.08 161.823,33.884 161.823,63.221 REGLETA15.4
pads on no net: ICSP.1 ICSP.2 ICSP.3 ICSP.4 ICSP.5 ICSP.6 TFT_CON.1 TFT_CON.2 TFT_CON.3 TFT_CON.4 TFT_CON.5 TFT_CON.6 TFT_CON.7 TFT_CON.8 TFT_CON.9 TFT_CON.10 TFT_CON.11 TFT_CON.12 TFT_CON.13 TFT_CON.14 TFT_CON.15 TFT_CON.16 TFT_CON.17 TFT_CON.18 TFT_CON.19 TFT_CON.20 TFT_CON.21 TFT_CON.22 TFT_CON.31 TFT_CON.32 TFT_CON.33 TFT_CON.34 TFT_CON.35 TFT_CON.36

## Polygon pours and split planes (outlines as drawn)
no net on Bottom Layer "Top Layer-No Net" (hatched 90Degree grid 0.508 track 0.203, pour order 2): 33.401,118.872 165.735,118.872 165.735,28.829 33.02,28.829 33.02,118.872 33.147,118.999

## Keep-outs
Keep-Out Layer:
  lines w0.254: 33.02,118.999 165.862,118.999 165.862,28.829 33.147,28.829 33.147,118.999

## Silkscreen, mask and mechanical layers (free items; w line width, h text height)
Top Overlay:
  text "TX0" at 107.823,117.475 h1.02
  text "RX0" at 112.903,117.475 h1.02
  text "TX3" at 118.364,117.475 h1.02
  text "RX3" at 123.698,117.475 h1.02
  text "TX2" at 128.778,117.475 h1.02
  text "RX2" at 133.985,117.475 h1.02
  text "TX1" at 139.573,117.475 h1.02
  text "RX1" at 144.78,117.475 h1.02
  text "SDA" at 149.733,117.475 h1.02
  text "SCL" at 154.686,117.475 h1.02
  text "13" at 45.085,115.824 h1.02
  text "12" at 50.165,115.824 h1.02
  text "11" at 55.245,115.824 h1.02
  text "10" at 60.325,115.824 h1.02
  text "9" at 66.802,115.824 h1.02
  text "8" at 72.009,115.824 h1.02
  text "7" at 77.47,115.824 h1.02
  text "6" at 82.677,115.824 h1.02
  text "5" at 87.63,115.824 h1.02
  text "4" at 92.71,115.824 h1.02
  text "3" at 98.679,115.824 h1.02
  text "2" at 103.759,115.824 h1.02
  text "1" at 108.966,115.824 h1.02
  text "0" at 113.919,115.824 h1.02
  text "14" at 118.999,115.824 h1.02
  text "15" at 124.079,115.824 h1.02
  text "16" at 129.54,115.824 h1.02
  text "17" at 134.62,115.824 h1.02
  text "18" at 140.335,115.824 h1.02
  text "19" at 145.415,115.824 h1.02
  text "20" at 150.241,115.824 h1.02
  text "21" at 155.321,115.824 h1.02
  text "GND" at 35.814,97.663 h1.02 r90
  text "42" at 164.719,92.964 h1.02 r90
  text "AREF" at 35.814,92.456 h1.02 r90
  text "43" at 164.719,87.757 h1.02 r90
  text "44" at 164.719,82.55 h1.02 r90
  text "45" at 164.719,77.724 h1.02 r90
  text "12-9V" at 35.433,70.231 h1.02 r90
  text "46" at 164.719,66.04 h1.02 r90
  text "GND" at 35.814,64.135 h1.02 r90
  text "47" at 164.719,61.341 h1.02 r90
  text "5V" at 35.814,57.404 h1.02 r90
  text "48" at 164.719,56.134 h1.02 r90
  text "49" at 164.719,51.181 h1.02 r90
  text "IOREF" at 35.814,41.783 h1.02 r90
  text "RESET" at 35.814,36.195 h1.02 r90
  text "3.3V" at 35.814,31.623 h1.02 r90
  text "5V" at 55.88,29.718 h1.02
  text "GND" at 60.833,29.718 h1.02
  text "GND" at 65.913,29.718 h1.02
  text "Vin" at 71.247,29.718 h1.02
  text "A0" at 77.216,29.718 h1.02
  text "A1" at 82.55,29.718 h1.02
  text "A2" at 87.376,29.718 h1.02
  text "A3" at 92.583,29.718 h1.02
  text "A4" at 98.171,29.718 h1.02
  text "A5" at 103.251,29.718 h1.02
  text "A6" at 108.331,29.718 h1.02
  text "A7" at 113.411,29.718 h1.02
  text "A8" at 119.38,29.718 h1.02
  text "A9" at 124.46,29.718 h1.02
  text "A10" at 128.905,29.718 h1.02
  text "A11" at 134.112,29.718 h1.02
  text "A12" at 139.827,29.718 h1.02
  text "A13" at 145.034,29.718 h1.02
  text "A14" at 149.86,29.718 h1.02
  text "A15" at 155.067,29.718 h1.02